# Altium PCB Control.PcbDoc
Units mil, origin at the board's own origin, x right, y up, seen from the top; angles counter-clockwise.
Board outline 2952.76 x 1331 mil, 2 copper layers (Top Layer, Bottom Layer); 29 components, 23 nets, 112 pads, 26 vias.
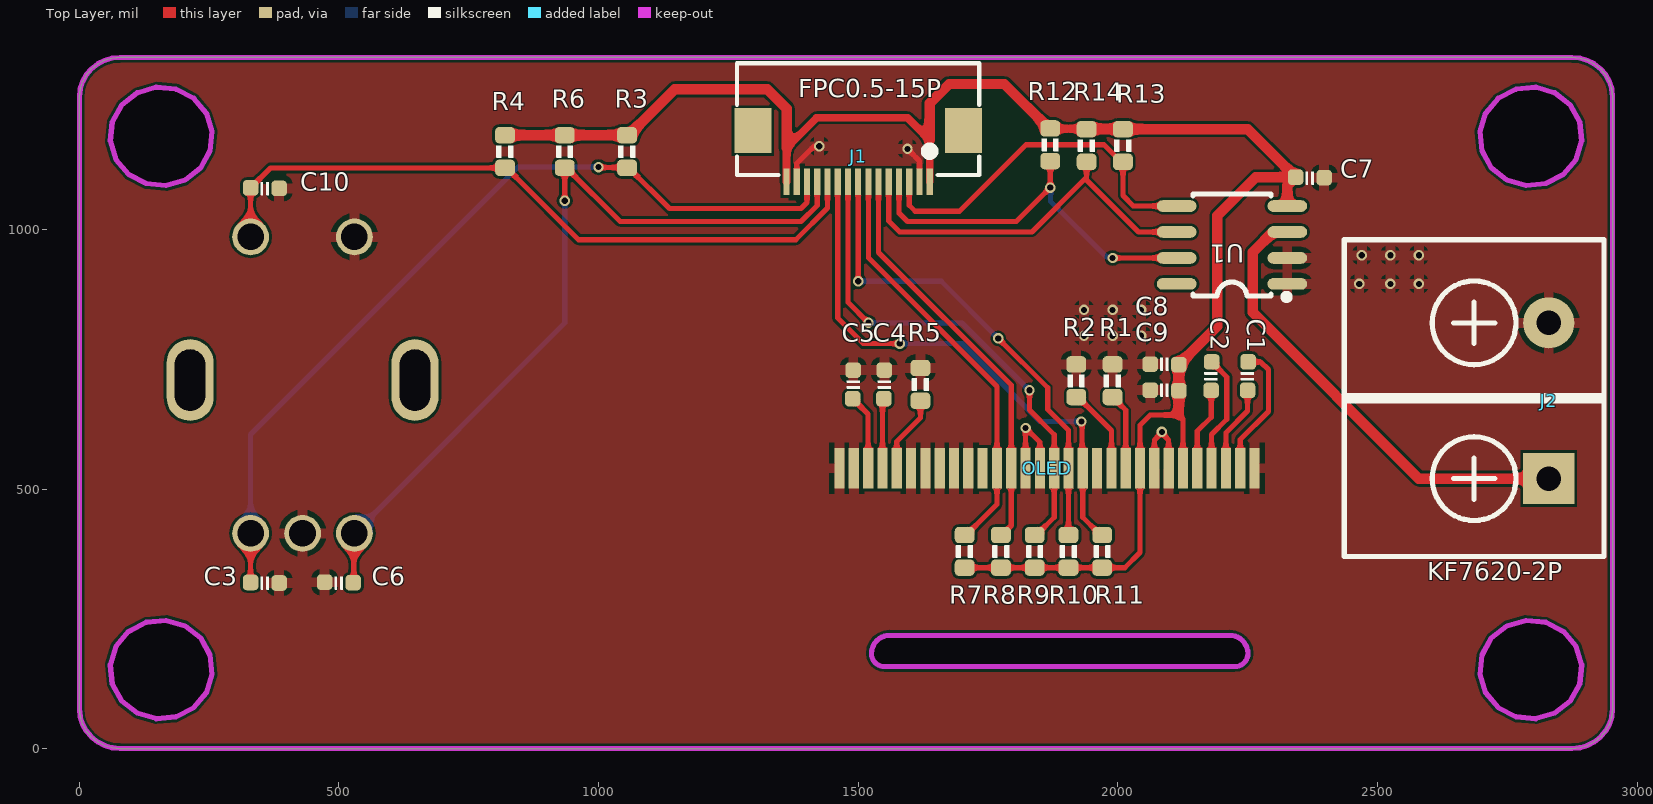
[diagram p0: Top Layer view]
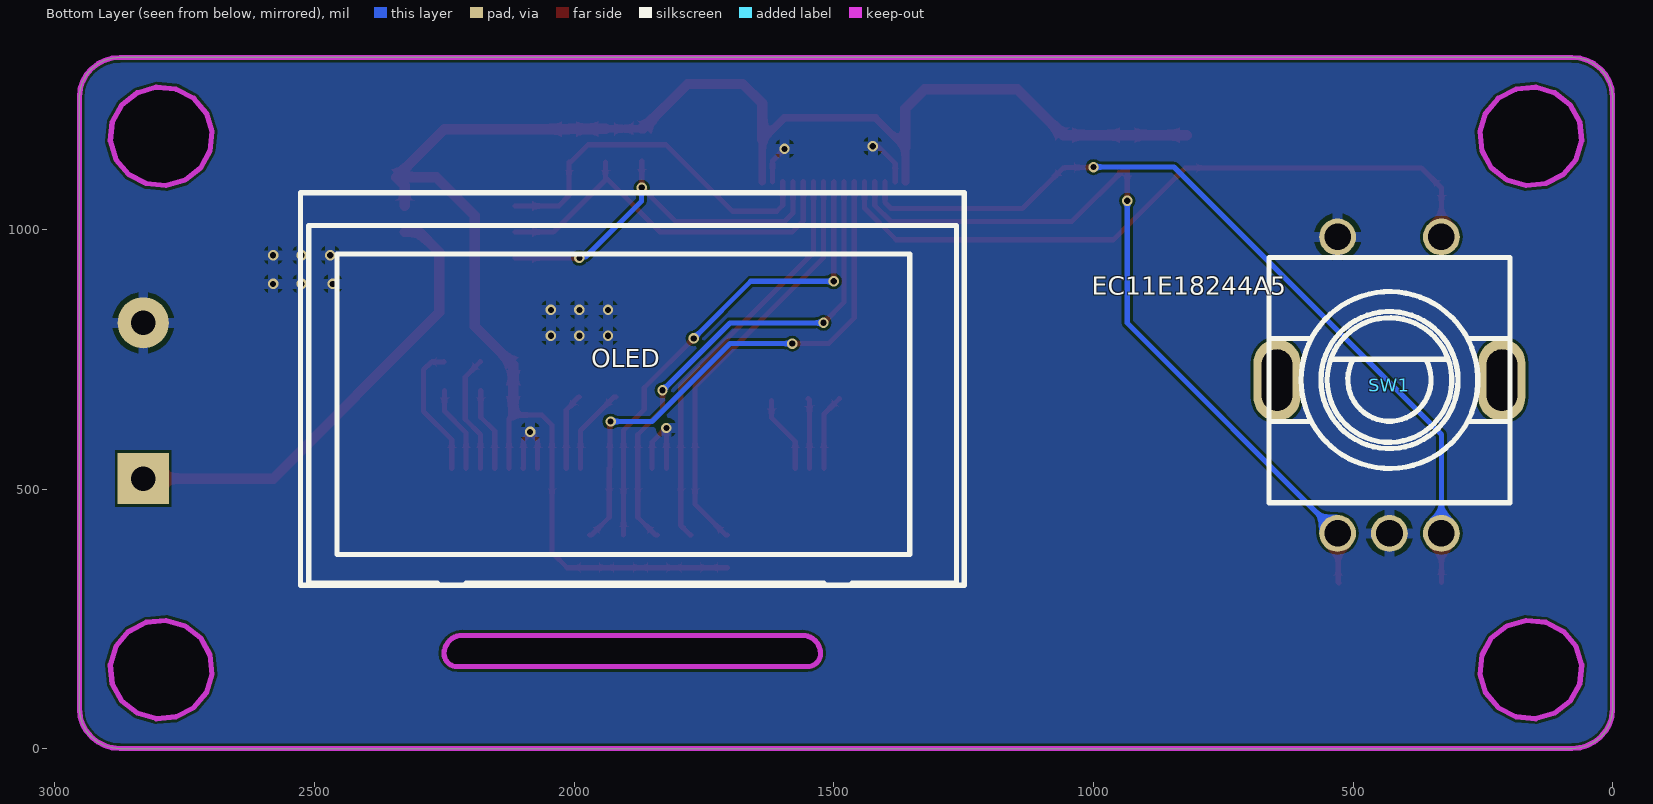
[diagram p1: Bottom Layer view, seen from below]

## Layer stack, top to bottom
Top Solder: solder mask 0.4, Solder Resist, Dk 3.5
Top Layer: signal copper 1.4
Dielectric 1: dielectric 12.6, FR-4, Dk 4.8
Bottom Layer: signal copper 1.4
Bottom Solder: solder mask 0.4, Solder Resist, Dk 3.5

## Board outline
6.24,47.2 1.76,61.47 0.25,76.31 0.25,1255.19 1.76,1270.03 6.24,1284.3 13.52,1297.45 23.31,1308.97 35.24,1318.43 48.86,1325.46 63.63,1329.79 78.99,1331.25 2874.27,1331.25 2889.63,1329.79 2904.4,1325.46 2918.01,1318.43 2929.94,1308.97 2939.74,1297.45 2947.01,1284.3 2951.49,1270.03 2953.01,1255.19 2953.01,76.31 2951.49,61.47 2947.01,47.2 2939.74,34.05 2929.94,22.53 2918.01,13.07 2904.4,6.04 2889.63,1.71 2874.27,0.25 78.99,0.25 63.63,1.71 48.86,6.04 35.24,13.07 23.31,22.53 13.52,34.05
cut-out: 1525.67,183.17 ccw(c1550.67,183.17) 1550.67,158.17 2225.67,158.17 ccw(c2225.67,183.17) 2250.67,183.17 ccw(c2215.67,183.17) 2215.67,218.17 1560.67,218.17 ccw(c1560.67,183.17)
cut-out: 2701.4,1151.34 2719.58,1118.66 2749.32,1095.19 2786.09,1084.5 2824.3,1088.22 2858.13,1105.78 2882.43,1134.5 2893.5,1170.02 2889.65,1206.93 2871.47,1239.61 2841.73,1263.08 2804.96,1273.77 2766.75,1270.05 2732.92,1252.5 2708.62,1223.77 2697.55,1188.25
cut-out: 2708.62,107.73 2732.92,79 2766.75,61.45 2804.96,57.73 2841.73,68.42 2871.47,91.89 2889.65,124.57 2893.5,161.48 2882.43,197 2858.13,225.72 2824.3,243.28 2786.09,247 2749.32,236.31 2719.58,212.84 2701.4,180.16 2697.55,143.25
cut-out: 81.78,91.89 63.61,124.57 59.76,161.48 70.83,197 95.12,225.72 128.95,243.28 167.16,247 203.94,236.31 233.68,212.84 251.85,180.16 255.7,143.25 244.63,107.73 220.34,79 186.51,61.45 148.3,57.73 111.52,68.42
cut-out: 95.12,1105.78 70.83,1134.5 59.76,1170.02 63.61,1206.93 81.78,1239.61 111.52,1263.08 148.3,1273.77 186.51,1270.05 220.34,1252.5 244.63,1223.77 255.7,1188.25 251.85,1151.34 233.68,1118.66 203.94,1095.19 167.16,1084.5 128.95,1088.22

## Design rules (kind name [scope] priority, off if disabled: settings)
Clearance [All] p1: gap=5 ignorepadtopadclearanceinfootprint=FALSE except(0: Arc-Hole Track-Hole SMDPad-Hole THPad-Hole Via-Hole Fill-Hole Poly-Hole Region-Hole Text-Hole)
ComponentClearance [All] p1: gap=0 collisioncheckmode=3 verticalgap=0 showdistances=FALSE
Height [All] p1: minheight=0 maxheight=99999 prefheight=0
HoleSize [All] p1: absolutevalues=TRUE maxlimit=99999 minlimit=1 maxpercent=80.000 minpercent=20.000
PlaneClearance [All] p1: clearance=10
PlaneConnect [All] p1: planeconnectstyle=Relief reliefexpansion=20 reliefentries=4 reliefconductorwidth=10 reliefairgap=5
PolygonConnect [All] p1: connectstyle=Relief reliefconductorwidth=20 reliefentries=4 polygonreliefangle="90 Angle" airgapwidth=10
RoutingVias [All] p1: holewidth=15 width=20 viastyle="Through Hole" minholewidth=8 minwidth=10 maxholewidth=28 maxwidth=50
SilkToSilkClearance [All] p1: silktosilkclearance=5
SilkToSolderMaskClearance [IsPad] p1: minsilkscreentomaskgap=5 clearancetoexposedcopper=TRUE
SolderMaskExpansion [All] p1: expansion=4 istentingtop=FALSE
Width [All] p1: maxlimit=99999 minlimit=5 preferedwidth=20
23 further rules are at their usual default settings.

## Components (designator, comment, footprint, x,y, rotation, side; value= is the part's Value field where it differs from the comment)
C1 "1uF" 0603C 2250.5,717.5 r90 top
C2 "1uF" 0603C 2180.5,717.5 r90 top
C3 "0.1uF" 0603C 357.5,319.5 r180 top
C4 "4.7uF" 0603C 1550,701.5 r270 top
C5 "2.2uF" 0603C 1490,701.5 r270 top
C6 "0.1uF" 0603C 500,320 r180 top
C7 "0.1uF" 0603C 2370,1100 r180 top
C8 "0.1uF" 0603C 2090,740 r0 top
C9 "10uF" 0603C 2090,690 r0 top
C10 "0.1uF" 0603C 357.5,1079.5 r180 top
J1 "FPC0.5-15P" FPC0.5-15P 1500,1190 r180 top
J2 "KF7620-2P" KF7620-2P 2830,520 r90 top
OLED "UG-2864KSWLG01" OLED-1.3 1918.78,740 r180 bottom (schematic designator OLED1)
R1 "4.7K" 0603R 1990,708.5 r270 top
R2 "4.7K" 0603R 1920,708.5 r270 top
R3 "10K" 0603R 1055,1150 r90 top
R4 "10K" 0603R 820,1150 r90 top
R5 "910K" 0603R 1620,701.5 r270 top
R6 "10K" 0603R 935,1150 r90 top
R7 "10K" 0603R 1705,380 r270 top
R8 "10K" 0603R 1775,380 r270 top
R9 "10K" 0603R 1840,380 r270 top
R10 "10K" 0603R 1905,380 r270 top
R11 "10K" 0603R 1970,380 r270 top
R12 "10K" 0603R 1870,1162.99 r90 top
R13 "10K" 0603R 2010,1161.5 r90 top
R14 "10K" 0603R 1940,1161.5 r90 top
SW1 "EC11E18244A5" SW-TH_EC11E18244A5 430,700 r180 bottom
U1 "MAX6675ISA+T" SOIC-8_L5.0-W4.0-P1.27-LS6.0-BL 2220,970 r180 top

## Footprints (in the part's own frame and the unit in brackets; to place one, negate y for a bottom-side part, rotate by r counter-clockwise, add the part's x,y. Pads: shape width x height; smd on the part's side, far side on the other; paste and mask are expansions set on the pad)
0603C [mil]
  rrect50% 30x30 smd: 1(-27.5,0.5) 2(27.5,-0.5)
  silkscreen extent -7,-11 7,13, body extent -29,-14 34,17, height 12
0603R [mm]
  rrect50% 0.8x0.965 smd: 1(-0.8,0) 2(0.8,0)
  silkscreen extent -0.29,-0.4 0.29,0.4, body extent -0.84,-0.41 0.76,0.41, height 0.45
FPC0.5-15P [mm]
  rect 1.8x2.2 smd: 0(-5.15,0) 0(5.15,0)
  rect 0.3x1.3 smd: 1(-3.5,2.497) 2(-3,2.497) 3(-2.5,2.497) 4(-2,2.497) 5(-1.5,2.497) 6(-1,2.497) 7(-0.5,2.497) 8(0,2.497) 9(0.5,2.497) 10(1,2.497) 11(1.5,2.497) 12(2,2.497) 13(2.5,2.497) 14(3,2.497) 15(3.5,2.497)
  silkscreen extent -5.93,-3.3 5.93,2.16, body extent -5.88,-3.26 5.82,2.74, height 2
KF7620-2P [mm] "15.2*12*12mm(长宽高)"
  rect 2.5x2.5 hole 1.2: 1(0,0)
  round 2.5 hole 1.2: 2(7.62,0)
  silkscreen extent -3.81,-2.7 11.68,10, body extent -3.81,-2.52 12.13,9.88, height 12.45
OLED-1.3 [mm]
  rect 0.5x2 smd far side: 1(-8.753,-5.08) 2(-8.054,-5.079) 3(-7.353,-5.08) 4(-6.653,-5.08) 5(-5.953,-5.08) 6(-5.253,-5.08) 7(-4.553,-5.08) 8(-3.853,-5.08) 9(-3.153,-5.08) 10(-2.453,-5.08) 11(-1.753,-5.08) 12(-1.053,-5.08) 13(-0.353,-5.08) 14(0.347,-5.08) 15(1.048,-5.08) 16(1.747,-5.08) 17(2.447,-5.08) 18(3.147,-5.08) 19(3.848,-5.079) 20(4.547,-5.08) 21(5.248,-5.081) 22(5.947,-5.08) 23(6.646,-5.08) 24(7.347,-5.08) 25(8.047,-5.079) 26(8.747,-5.08) 27(9.448,-5.079) 28(10.147,-5.08) 29(10.848,-5.08) 30(11.547,-5.08)
  silkscreen extent -15.45,-10.8 17.02,8.4, body extent -14.86,-14.58 17.56,8.23, height 2.02
SOIC-8_L5.0-W4.0-P1.27-LS6.0-BL [mil]
  oval 76.78x22.38 smd: 1(-106.5,74.99) 2(-106.5,24.99) 3(-106.5,-25.01) 4(-106.5,-75.01) 5(106.5,-75.01) 6(106.5,-25.01) 7(106.5,24.99) 8(106.5,74.99)
  silkscreen extent -111,-98 75,106, body extent -122,-98 122,98, height 69
SW-TH_EC11E18244A5 [mm]
  oval 2.3x4 hole 1.5 slot 3 at 90 deg: 6(5.5,0.25) 7(-5.5,0.25)
  round 1.8 hole 1.3: A(-2.54,-7.25) B(2.54,-7.25) C(0,-7.25) D(-2.54,7.25) E(2.54,7.25)
  silkscreen extent -5.9,-5.75 5.9,6.25, body extent -5.98,-7.47 5.73,7.48, height 24.5

## Part data
C1 C2 C3 C4 C5 C6 C7 C8 C9 C10: library part CAP, "无极性电容"
J1: "贴片"
OLED: BOM_Manufacturer=UG, BOM_Manufacturer Part=UG-2864KSWLG01, BOM_Supplier=LCSC, BOM_Supplier Part=C113322, spicePre=O, spiceSymbolName=UG-2864KSWLG01
R1 R2 R3 R4 R5 R6 R7 R8 R9 R10 R11 R12 R13 R14: library part RES
SW1: BOM_Manufacturer="ALPS Electric", BOM_Manufacturer Part=EC11E18244A5, BOM_Supplier=LCSC, BOM_Supplier Part=C255515, Contributor=LCSC, spicePre=S, spiceSymbolName=EC11E18244A5
U1: JLCPCB Part Class="Extended Part", LCSC Part Name=MAX6675ISA, Manufacturer=ADI(亚德诺), Operating Temperature=-20℃~+85℃, Supply Voltage=-300mV~6V, Add into BOM=yes, Chip Type Parameters/Description=热电偶到数字转换器, Convert to PCB=yes, Datasheet=https://atta.szlcsc.com/upload/public/pdf/source/20170713/C16030_1499918913843816819.pdf, Device=MAX6675ISA+T, Interface Type=SPI, Manufacturer Part=MAX6675ISA+T, Name=MAX6675ISA+T, Number of Channels=-, Resolution=12, Supplier=LCSC, Supplier Footprint=SOIC-8, Supplier Part=C16030, Symbol=MAX6675ISA+T

## Via types
v1: diameter 20, hole 12, Top Layer to Bottom Layer, 26 vias

## Nets (pads, with @x,y where several pads share a name; then routed paths per layer and width w, separated by ;. In a path a pad name is that pad's centre, name@x,y a point inside that pad or via, vN(x,y) a via of type N, cw(c..) or ccw(c..) an arc to the next point about the centre after c; other vN are vias at no path point)
EC11_A: C6.1 J1.12 R6.1 SW1.A | length 1555.3
  Top Layer w10: C6.1 528.75,320.75 528.75,413.31 SW1.A ; v1(935,1055) R6.1 938.25,1118.5 1041.75,1015 1390,1015 1421.26,1046.26 J1.12
  Bottom Layer w10: SW1.A 935,819.56 v1(935,1055)
EC11_B: C3.2 J1.13 R3.1 SW1.B | length 1647.9
  Top Layer w10: C3.2 SW1.B ; v1(1000,1120) 1000.75,1119.25 1054.25,1119.25 R3.1 1058.25,1118.5 1136.75,1040 1390,1040 1401.58,1051.58 J1.13
  Bottom Layer w10: SW1.B 330,605 845,1120 v1(1000,1120)
EC11_KEY: C10.2 J1.11 R4.1 SW1.E | length 1354.8
  Top Layer w10: SW1.E C10.2 368.5,1118.5 R4.1 823.25,1118.5 961.75,980 1380,980 1440.95,1040.95 J1.11
GND: C3.1 C4.1 C5.1 C6.2 C7.1 C8.1 C9.1 C10.1 J1.2 J1.14 J2.2 OLED.1 OLED.7 OLED.8 OLED.12 OLED.16 OLED.17 OLED.21 OLED.22 OLED.23 OLED.24 OLED.25 OLED.29 OLED.30 R1.1 R2.1 R5.1 SW1.C SW1.D U1.1 U1.2 | length 481.8
  Top Layer w10: J1.14 1381.89,1126.89 1415,1160 v1(1425,1160) ; v1(1595,1155) 1618.11,1131.89 J1.2 ; OLED.17 v1(1822.44,617.56) 1850,590 OLED.16 ; OLED.8 2070.47,594.37 v1@2085,608.9 ; v1(2085,610) v1@2085,608.9 ; OLED.7 2097.92,540.11 2097.92,594.37 2085,607.29 v1@2085,608.9
  other v1: 1935,795 1990,795 2045,795 1935,845 1990,845 2045,845 2465,895 2525,895 2580,895 2470,950 2525,950 2580,950
K_CS: J1.5 R14.1 U1.6 | length 755.1
  Top Layer w10: J1.5 1559.06,1015.94 1580,995 1834.57,995 1937.29,1097.71 ; R14.1 1940,1095.86 1940,1095 2039.99,995.01 U1.6
K_MISO: J1.4 R12.1 U1.7 | length 751.1
  Top Layer w10: J1.4 1578.74,1031.26 1595,1015 1804.57,1015 v1(1870,1080.43) R12.1 ; v1(1990,945) U1.7
  Bottom Layer w10: v1(1870,1080.43) 1870.64,1079.79 1870.64,1054.36 1978.09,946.91 1988.09,946.91 v1(1990,945)
K_SCK: J1.3 R13.1 U1.5 | length 705
  Top Layer w10: J1.3 1598.43,1046.57 1610,1035 1695,1035 1790,1130 1823.1,1163.1 1973.65,1163.1 2006.75,1130 R13.1 2010,1065 2029.99,1045.01 U1.5
NetC1_1: C1.1 OLED.3 | length 167.3
  Top Layer w10: OLED.3 2208.26,608.26 2250,650 C1.1
NetC1_2: C1.2 OLED.2 | length 257.6
  Top Layer w10: OLED.2 2235.86,595.13 2290,649.28 2290,730 2275.14,744.86 2251.14,744.86 C1.2
NetC2_1: C2.1 OLED.5 | length 161.1
  Top Layer w10: OLED.5 2153.14,611.43 2180,638.29 C2.1
NetC2_2: C2.2 OLED.4 | length 229.1
  Top Layer w10: OLED.4 2180.7,605.12 2210,634.42 2210,716 C2.2
NetC4_2: C4.2 OLED.27 | length 135.1
  Top Layer w10: OLED.27 1546.81,671.31 C4.2
NetC5_2: C5.2 OLED.28 | length 146.3
  Top Layer w10: C5.2 1519.29,644.21 OLED.28
NetJ2_1: J2.1 U1.3 | length 901
  Top Layer w20: U1.3 2299.3,995.01 2260,955.71 2260,840 2580,520 J2.1
NetOLED1_10: OLED.10 R1.2 | length 148.5
  Top Layer w10: R1.2 1991.69,677.01 2002.22,666.48 2002.22,664.79 2015.35,651.66 OLED.10
NetOLED1_11: OLED.11 R2.2 | length 167
  Top Layer w10: R2.2 1923.25,677.01 1987.79,612.47 OLED.11
NetOLED1_26: OLED.26 R5.2 | length 148.9
  Top Layer w10: OLED.26 1574.41,591.71 1620,637.3 R5.2
OLED_CLK: J1.6 OLED.18 R8.1 | length 795.3
  Top Layer w10: J1.6 1539.37,955.63 1794.88,700.12 OLED.18 1794.88,429.68 1776.69,411.5 R8.1
OLED_CS: J1.10 OLED.13 R11.1 | length 1051.2
  Top Layer w10: J1.10 1460.63,829.37 1510,780 v1(1580,780) ; v1(1930,630) 1931.34,628.66 1931.34,541.34 OLED.13 1932.67,445.58 1966.75,411.5 R11.1
  Bottom Layer w10: v1(1580,780) 1700,780 1850,630 v1(1930,630)
OLED_D/C: J1.9 OLED.15 R9.1 | length 967.6
  Top Layer w10: J1.9 1480.32,859.68 v1(1520,820) ; v1(1830,690) 1830,652.17 1877.51,604.66 OLED.15 1877.51,445.76 1843.25,411.5 R9.1
  Bottom Layer w10: v1(1520,820) 1700,820 v1(1830,690)
OLED_RES: J1.8 OLED.14 R10.1 | length 941.5
  Top Layer w10: J1.8 1500.16,1091.54 1500.16,900.16 v1(1500.32,900) ; v1(1770,790) 1865,695 1865,653.36 1905.06,613.3 OLED.14 1905.06,411.55 R10.1
  Bottom Layer w10: v1(1500.32,900) 1660,900 v1(1770,790)
OLED_SDA: J1.7 OLED.19 R7.1 | length 810.5
  Top Layer w10: J1.7 1519.69,945.31 1767.28,697.72 OLED.19 1767.28,470.53 1708.25,411.5 R7.1
VCC3.3: C7.2 C8.2 C9.2 J1.1 J1.15 OLED.6 OLED.9 R3.2 R4.2 R6.2 R7.2 R8.2 R9.2 R10.2 R11.2 R12.2 R13.2 R14.2 U1.4 | length 3511.3
  Top Layer w10: R7.2 R8.2 R9.2 R10.2 R11.2 2013.5,348.5 2042.91,377.91 OLED.9 2042.91,622.91 2062.5,642.5 2117.5,642.5 2125.59,634.41 OLED.6
  Top Layer w15: J1.15 1362.2,1157.2 1420,1215 1595,1215 1637.8,1172.2 J1.1 ; R12.2 1870.75,1193.74 1939.25,1193.74 R14.2 R13.2
  Top Layer w20: R4.2 R6.2 R3.2 1058.25,1181.5 1146.75,1270 1325,1270 1362.2,1232.8 1362.2,1157.2 ; 1637.8,1172.2 1637.8,1242.8 1675,1280 1781.24,1280 1866.75,1194.49 R12.2 ; R14.2@1939.25,1193.74 2009.25,1193.74 R13.2 2250.01,1192.99 C7.2 ; 2117.5,642.5 C9.2 C8.2 2191.25,813.25 2191.25,1026.25 2265.5,1100.5 C7.2 ; U1.4 2326.5,1084.5 C7.2
pads on no net: J1.0 OLED.20 SW1.6 SW1.7 U1.8

## Polygon pours and split planes (outlines as drawn)
GND on Bottom Layer "Bottom Layer-GND" (solid, remove dead copper, pour order 1): 6.24,47.2 1.76,61.47 0.25,76.31 0.25,1255.19 1.76,1270.03 6.24,1284.3 13.52,1297.45 23.31,1308.97 35.24,1318.43 48.86,1325.46 63.63,1329.79 78.99,1331.25 2874.27,1331.25 2889.63,1329.79 2904.4,1325.46 2918.01,1318.43 2929.94,1308.97 2939.74,1297.45 2947.01,1284.3 2951.49,1270.03 2953.01,1255.19 2953.01,76.31 2951.49,61.47 2947.01,47.2 2939.74,34.05 2929.94,22.53 2918.01,13.07 2904.4,6.04 2889.63,1.71 2874.27,0.25 78.99,0.25 63.63,1.71 48.86,6.04 35.24,13.07 23.31,22.53 13.52,34.05
GND on Top Layer "Top Layer-GND" (solid, remove dead copper, pour order 0): 6.24,47.2 1.76,61.47 0.25,76.31 0.25,1255.19 1.76,1270.03 6.24,1284.3 13.52,1297.45 23.31,1308.97 35.24,1318.43 48.86,1325.46 63.63,1329.79 78.99,1331.25 2874.27,1331.25 2889.63,1329.79 2904.4,1325.46 2918.01,1318.43 2929.94,1308.97 2939.74,1297.45 2947.01,1284.3 2951.49,1270.03 2953.01,1255.19 2953.01,76.31 2951.49,61.47 2947.01,47.2 2939.74,34.05 2929.94,22.53 2918.01,13.07 2904.4,6.04 2889.63,1.71 2874.27,0.25 78.99,0.25 63.63,1.71 48.86,6.04 35.24,13.07 23.31,22.53 13.52,34.05

## Keep-outs
Keep-Out Layer:
  lines w10: 0.25,76.31 0.25,1255.19 1.76,1270.03 6.24,1284.3 13.52,1297.45 23.31,1308.97 35.24,1318.43 48.86,1325.46 63.63,1329.79 78.99,1331.25 2874.27,1331.25 2889.63,1329.79 2904.4,1325.46 2918.01,1318.43 2929.94,1308.97 2939.74,1297.45 2947.01,1284.3 2951.49,1270.03 2953.01,1255.19 2953.01,76.31 2951.49,61.47 2947.01,47.2 2939.74,34.05 2929.94,22.53 2918.01,13.07 2904.4,6.04 2889.63,1.71 2874.27,0.25 78.99,0.25 63.63,1.71 48.86,6.04 35.24,13.07 23.31,22.53 13.52,34.05 6.24,47.2 1.76,61.47 0.25,76.31 ; 59.76,161.48 63.61,124.57 81.78,91.89 111.52,68.42 148.3,57.73 186.51,61.45 220.34,79 244.63,107.73 255.7,143.25 251.85,180.16 233.68,212.84 203.94,236.31 167.16,247 128.95,243.28 95.12,225.72 70.83,197 59.76,161.48 ; 59.76,1170.02 63.61,1206.93 81.78,1239.61 111.52,1263.08 148.3,1273.77 186.51,1270.05 220.34,1252.5 244.63,1223.77 255.7,1188.25 251.85,1151.34 233.68,1118.66 203.94,1095.19 167.16,1084.5 128.95,1088.22 95.12,1105.78 70.83,1134.5 59.76,1170.02 ; 1525.67,183.17 cw(c1560.67,183.17) 1560.67,218.17 1595.67,218.17 2215.67,218.17 cw(c2215.67,183.17) 2250.67,183.17 cw(c2225.67,183.17) 2225.67,158.17 1550.67,158.17 cw(c1550.67,183.17) 1525.67,183.17 ; 2697.55,143.25 2701.4,180.16 2719.58,212.84 2749.32,236.31 2786.09,247 2824.3,243.28 2858.13,225.72 2882.43,197 2893.5,161.48 2889.65,124.57 2871.47,91.89 2841.73,68.42 2804.96,57.73 2766.75,61.45 2732.92,79 2708.62,107.73 2697.55,143.25 ; 2697.55,1188.25 2701.4,1151.34 2719.58,1118.66 2749.32,1095.19 2786.09,1084.5 2824.3,1088.22 2858.13,1105.78 2882.43,1134.5 2893.5,1170.02 2889.65,1206.93 2871.47,1239.61 2841.73,1263.08 2804.96,1273.77 2766.75,1270.05 2732.92,1252.5 2708.62,1223.77 2697.55,1188.25